# EAGLE board PentaFnord_LedBoard_0_9 (EAGLE 5.11)
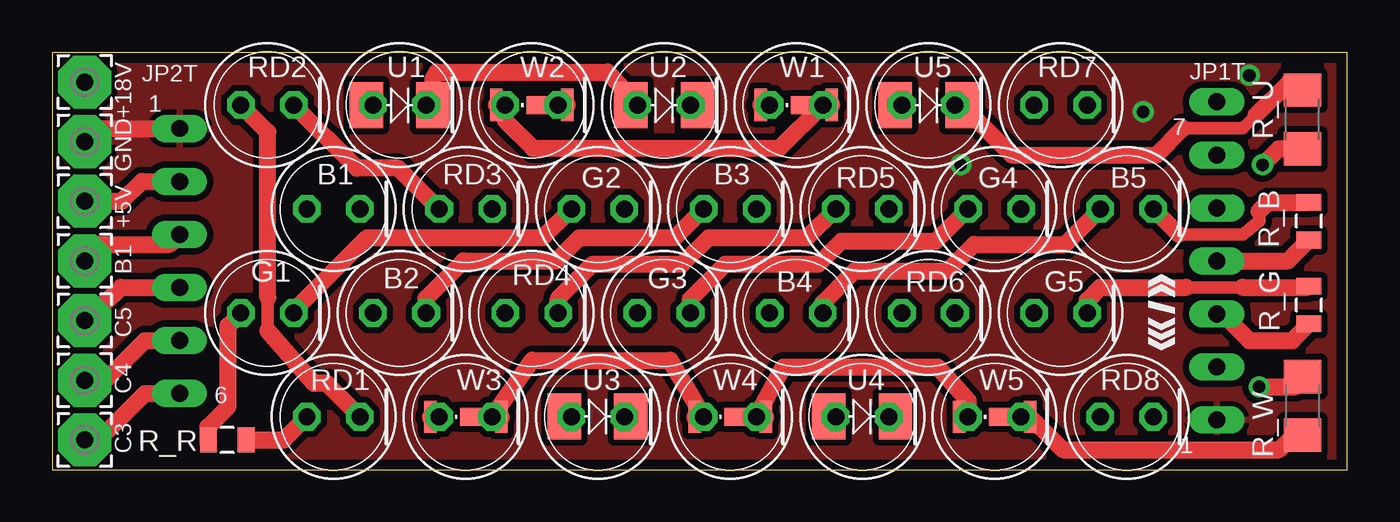
[diagram p0: board, top side]
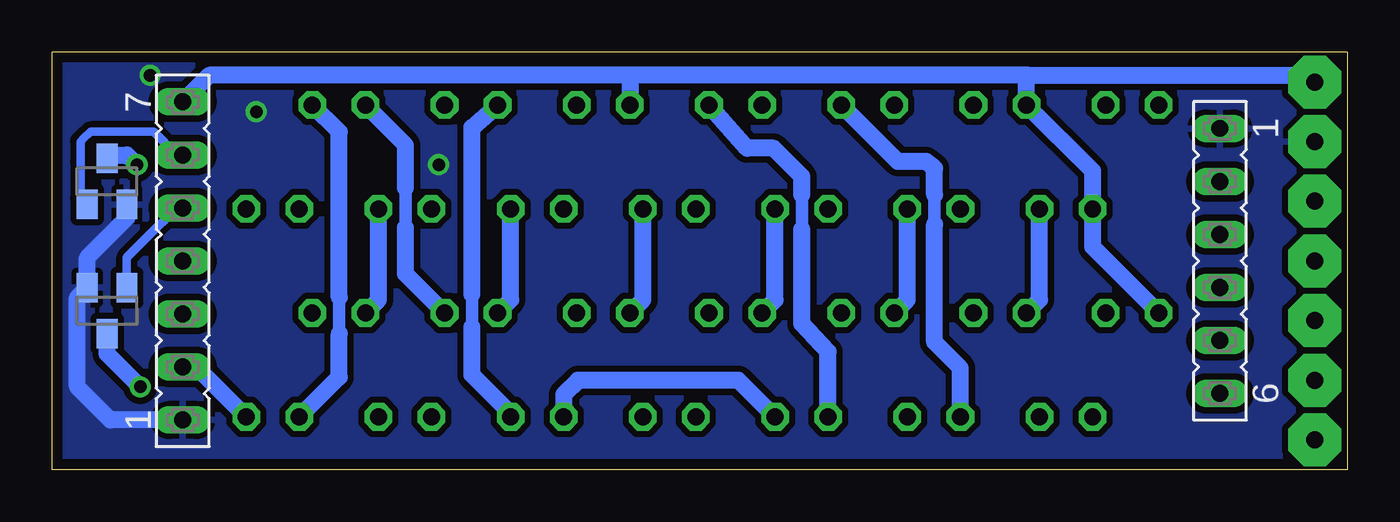
[diagram p1: board, bottom side, seen from below]

Size 62 x 20 mm. Coordinates in mm from the lower left corner, seen from the top.
Outline: 0,0 62,0 62,20 0,20 0,0
Copper layers (1*16): Top 0.035mm / dielectric 1.5mm / Bottom 0.035mm
Design rules "default *": minimum track width 12mil, minimum drill 0.4mm, track to track 10mil, track to pad 10mil, pad to pad 8mil, via to via 10mil, smd to smd 8mil, copper to edge 20mil, drill to drill 8mil, minimum pad ring 10mil, minimum via ring 8mil, stop-mask expansion 4mil, vias tented up to drill 40mil, thermal gap 10mil

## Footprints (pad centres in the part's own frame; a part is rotated, then mirrored left to right if it is on the bottom)
LED5MM = drill 0.813 octagon: A -1.27,0; K 1.27,0
FE07 = drill 0.813 long: 1 -7.62,0; 2 -5.08,0; 3 -2.54,0; 4 0,0; 5 2.54,0; 6 5.08,0; 7 7.62,0
FE06 = drill 0.813 long: 1 -6.35,0; 2 -3.81,0; 3 -1.27,0; 4 1.27,0; 5 3.81,0; 6 6.35,0
2,54/0,8 = drill 0.813 pad 2.54 octagon: 1 0,0
SOT23 = smd 1 x 1.4: 1 -0.95,-1.1; 2 0.95,-1.1; 3 0,1.1
0805 = smd 0.8 x 1.2: 1 -0.9,0; 2 0.9,0
1206 = smd 1.6 x 1.8: 1 -1.4,0; 2 1.4,0
PLCC2 = smd 1.6 x 2.2: P$1 -1.6,0; P$2 1.6,0
NICHIA_NSSL157T-H3 = smd 0.64 x 0.86: A@1 1.08,0 | smd 0.6 x 1.55: A@2 1.7,0; K@1 -1.7,0 | smd 1.66 x 0.86: K@2 -0.57,0

## Placement (x,y rotation side)
B1  [LED5MM]  13.46,12.49 0 top
B2  [LED5MM]  16.63,7.51 0 top
B3  [LED5MM]  32.45,12.49 0 top
B4  [LED5MM]  35.62,7.51 0 top
B5  [LED5MM]  51.44,12.49 0 top
G1  [LED5MM]  10.3,7.51 0 top
G2  [LED5MM]  26.12,12.49 0 top
G3  [LED5MM]  29.29,7.51 0 top
G4  [LED5MM]  45.11,12.49 0 top
G5  [LED5MM]  48.28,7.51 0 top
JP1T  [FE07]  55.75,10 90 bottom
JP2T  [FE06]  6.1,10 270 bottom
P+5T  WIREPAD2,54/0,8  [2,54/0,8]  1.56,12.86 0 top
P+18T  WIREPAD2,54/0,8  [2,54/0,8]  1.56,18.57 0 top
PB1T  WIREPAD2,54/0,8  [2,54/0,8]  1.56,10 0 top
PC3T  WIREPAD2,54/0,8  [2,54/0,8]  1.56,1.43 0 top
PC4T  WIREPAD2,54/0,8  [2,54/0,8]  1.56,4.29 0 top
PC5T  WIREPAD2,54/0,8  [2,54/0,8]  1.56,7.14 0 top
PGNDT1  WIREPAD2,54/0,8  [2,54/0,8]  1.56,15.72 0 top
Q1  BSS138  [SOT23]  59.37,13.81 0 bottom
Q2  BSS138  [SOT23]  59.37,7.62 180 bottom
R_B  tbs  [0805]  60.17,11.91 90 top
R_G  tbs  [0805]  60.17,7.89 90 top
R_R  tbs  [0805]  8.38,1.43 180 top
R_U  tbs  [1206]  59.85,16.78 90 top
R_W  tbs  [1206]  59.85,3.06 270 top
RD1  [LED5MM]  13.46,2.53 0 top
RD2  [LED5MM]  10.3,17.47 0 top
RD3  [LED5MM]  19.79,12.49 0 top
RD4  [LED5MM]  22.96,7.51 0 top
RD5  [LED5MM]  38.78,12.49 0 top
RD6  [LED5MM]  41.95,7.51 0 top
RD7  [LED5MM]  48.28,17.47 0 top
RD8  [LED5MM]  51.44,2.53 0 top
U1  NICHIA_NSSL157T-H3  [PLCC2]  16.63,17.45 180 top
U1A  [LED5MM]  16.63,17.47 0 top
U2  NICHIA_NSSL157T-H3  [PLCC2]  29.29,17.46 180 top
U2A  [LED5MM]  29.29,17.47 0 top
U3  NICHIA_NSSL157T-H3  [PLCC2]  26.11,2.55 180 top
U3A  [LED5MM]  26.12,2.53 0 top
U4  NICHIA_NSSL157T-H3  [PLCC2]  38.77,2.55 180 top
U4A  [LED5MM]  38.78,2.53 0 top
U5  NICHIA_NSSL157T-H3  [PLCC2]  41.95,17.46 180 top
U5A  [LED5MM]  41.95,17.47 0 top
W1  NICHIA_NSSL157T-H3  [NICHIA_NSSL157T-H3]  35.62,17.47 180 top
W1A  [LED5MM]  35.62,17.47 0 top
W2  NICHIA_NSSL157T-H3  [NICHIA_NSSL157T-H3]  22.96,17.47 180 top
W2A  [LED5MM]  22.96,17.47 0 top
W3  NICHIA_NSSL157T-H3  [NICHIA_NSSL157T-H3]  19.79,2.53 180 top
W3A  [LED5MM]  19.79,2.53 0 top
W4  NICHIA_NSSL157T-H3  [NICHIA_NSSL157T-H3]  32.45,2.53 180 top
W4A  [LED5MM]  32.45,2.53 0 top
W5  NICHIA_NSSL157T-H3  [NICHIA_NSSL157T-H3]  45.11,2.53 180 top
W5A  [LED5MM]  45.11,2.53 0 top

## Library data of the parts
B1-B5 G1-G5 RD1-RD8 U1A U2A U3A U4A U5A W1A W2A W3A W4A W5A = Alex_personal
JP1T JP2T = con-lsta; OC_FARNELL: unknown; OC_NEWARK: unknown
P+5T P+18T PB1T PC3T PC4T PC5T PGNDT1 = wirepad
Q1 Q2 = transistor-small-signal
R_B R_G R_R R_U R_W = SparkFun
U1-U5 W1-W5 = seb

## Nets
_VCC: JP2T.2 P+5T.1
B1: JP2T.3 PB1T.1
C3/ADC3: JP2T.6 PC3T.1
C4/ADC4/SDA: JP2T.5 PC4T.1
C5/ADC5/SCL: JP2T.4 PC5T.1
GND_T: JP1T.1 JP2T.1 PGNDT1.1 Q1.2 Q2.2
N$1: G5.K R_G.2
N$2: W4.K@1 W4A.K W5.A@2 W5A.A
N$3: U1.P$1 U1A.K U2.P$2 U2A.A
N$5: U3.P$1 U3A.K U4.P$2 U4A.A
N$6: R_U.2 U5.P$1 U5A.K
N$7: R_W.2 W5.K@1 W5A.K
N$8: W3.K@1 W3A.K W4.A@2 W4A.A
N$10: U2.P$1 U2A.K U3.P$2 U3A.A
N$11: B1.K B2.A
N$12: U4.P$1 U4A.K U5.P$2 U5A.A
N$13: G1.K G2.A
N$14: G2.K G3.A
N$15: G3.K G4.A
N$16: G4.K G5.A
N$17: B2.K B3.A
N$18: B3.K B4.A
N$19: B4.K B5.A
N$20: B5.K R_B.2
N$21: RD1.K RD2.A
N$22: RD2.K RD3.A
N$23: RD3.K RD4.A
N$24: RD4.K RD5.A
N$25: RD5.K RD6.A
N$26: RD6.K RD7.A
N$27: R_R.1 RD1.A
N$28: RD7.K RD8.A
N$29: Q1.3 R_U.1
N$34: W2.K@1 W2A.K W3.A@2 W3A.A
N$37: Q2.3 R_W.1
N$39: JP1T.6 Q1.1
N$40: JP1T.5 Q2.1
N$41: JP1T.3 R_G.1
N$42: JP1T.4 R_B.1
N$43: JP1T.2 RD8.K
N$54: W1.K@1 W1A.K W2.A@2 W2A.A
V+: B1.A G1.A JP1T.7 P+18T.1 R_R.2 U1.P$2 U1A.A W1.A@2 W1A.A

## Tracks (layer width: path | path; a pad name or v marks a point on that pad's centre or on a via)
_VCC
  Top 0.813: JP2T.2 4.29,13.81 3.33,12.86 P+5T.1
B1
  Top 0.813: PB1T.1 2.19,10.79 5.62,10.79 JP2T.3
C3/ADC3
  Top 0.813: JP2T.6 4.44,3.65 2.22,1.43 PC3T.1
C4/ADC4/SDA
  Top 0.813: JP2T.5 4.44,6.19 2.54,4.29 PC4T.1
C5/ADC5/SCL
  Top 0.813: JP2T.4 3.3,8.73 PC5T.1
GND_T  (via drill 0.6)
  Top 0.813: JP2T.1 2.03,16.35 PGNDT1.1
  Bottom 0.813: Q1.2 58.42,12.06 59.37,11.11 60.32,10.16 Q2.2 60.8,8.24 60.8,3.97 59.21,2.38 JP1T.1
  other vias: 43.5,14.61 57.31,18.89 52.23,17.14
  pour Bottom (isolate 0.305): 0,20 62,20 62,0 0,0
  pour Top (isolate 0.305): 0,20 62,20 62,0 0,0
N$1
  Top 0.61: 54.29,8.73 56.99,8.73
  Top 0.813: 54.29,8.73 50.17,8.73 49.55,8.11 G5.K | 56.99,8.73 60.11,8.73 R_G.2
N$2
  Top 0.305: W5A.A W5.A@2
  Top 0.813: W5A.A 43.84,3.31 43.3,3.91 42.39,4.92 35,4.92 W4A.K W4.K@1
N$3
  Top 0.813: U1A.K U1.P$1 18.23,18.7 18.42,19.05 26.6,19.05 U2A.A U2.P$2
N$5
  Top 0.813: U3A.K U3.P$1 | U4A.A U4.P$2
  Bottom 0.813: U4A.A 37.51,3.6 36.83,4.29 29.15,4.29 U3A.K
N$6
  Top 0.61: 54.13,16.35 56.99,16.35 57.63,16.99
  Top 0.813: 54.13,16.35 52.86,15.08 45.94,15.08 U5.P$1 U5A.K | 59.21,18.1 59.21,18.42 R_U.2 59.21,18.57 57.63,16.99
N$7
  Top 0.813: R_W.2 59.21,1.43 58.74,0.95 48.39,0.95 W5.K@1 W5A.K
N$8
  Top 0.813: W3.K@1 W3A.K 22.98,5.24 29.58,5.24 W4A.A W4.A@2
N$10
  Top 0.813: U3A.A U3.P$2 | U2A.K U2.P$1
  Bottom 0.61: 26.11,11.51 26.11,13.18
  Bottom 0.813: U3A.A 24.85,5.64 26.11,6.99 26.11,11.51 | 26.11,13.18 26.11,14.05 27.46,15.4 28.73,15.4 U2A.K
N$11
  Bottom 0.813: B1.K 14.73,8.13 B2.A
N$12
  Top 0.406: U5A.A U5.P$2
  Top 0.813: U4A.K U4.P$1
  Bottom 0.61: 41.91,6.83 41.91,8.41
  Bottom 0.813: U5A.A 41.91,16.4 41.91,8.41 | 41.91,6.83 41.91,4.55 40.05,2.69 U4A.K
N$13
  Top 0.813: G2.A 23.47,11.11 15.08,11.11 11.57,7.6 G1.K
N$14
  Bottom 0.813: G2.K 27.39,8.13 G3.A
N$15
  Top 0.813: G4.A 42.31,10.95 37.78,10.95 36.67,9.84 32.23,9.84 30.56,8.17 G3.K
N$16
  Bottom 0.813: G4.K 46.38,8.13 G5.A
N$17
  Top 0.813: B3.A 29.8,11.11 25.24,11.11 24.13,10 19.68,10 17.9,8.21 B2.K
N$18
  Bottom 0.813: B3.K 33.72,8.13 B4.A
N$19
  Top 0.813: B5.A 48.48,10.79 44.13,10.79 42.86,9.53 38.42,9.53 36.89,8 B4.K
N$20
  Top 0.61: 57.78,12.38 57.78,11.91 56.99,11.27 53.93,11.27
  Top 0.813: B5.K 53.72,11.49 53.93,11.27 | R_B.2 58.21,12.81 57.78,12.38
N$21
  Top 0.61: 10.32,6.67 10.32,8.26
  Top 0.813: RD2.A 10.32,16.18 10.32,8.26 | 10.32,6.67 12.54,4.13 13.18,4.13 13.18,4.09 RD1.K
N$22
  Top 0.813: RD2.K 14.59,14.45 16.57,14.45 RD3.A
N$23
  Bottom 0.813: RD3.K 21.06,8.13 RD4.A
N$24
  Top 0.813: RD5.A 36.13,11.11 31.43,11.11 30.16,9.84 25.88,9.84 24.23,8.19 RD4.K
N$25
  Bottom 0.813: RD5.K 40.05,8.13 RD6.A
N$26
  Bottom 0.61: 45.09,11.59 45.09,13.49
  Bottom 0.813: RD6.K 45.09,9.38 45.09,11.59 | 45.09,13.49 45.09,15.55 RD7.A
N$27
  Top 0.813: R_R.1 11.09,1.43 RD1.A
N$28
  Bottom 0.61: 48.26,6.51 48.26,8.26
  Bottom 0.813: RD7.K 48.26,16.18 48.26,8.26 | 48.26,6.51 48.26,4.44 RD8.A
N$29  (via drill 0.6)
  Top 0.813: R_U.1 58.72,15.38 v57.94,14.61
  Bottom 0.406: Q1.3 59.2,15.08
  Bottom 0.813: 59.2,15.08 58.42,15.08 v57.94,14.61
N$34
  Top 0.813: W3A.A W3.A@2 | W2A.K W2.K@1
  Bottom 0.61: 19.76,11.75 19.76,13.18
  Bottom 0.813: W3A.A 18.52,4.87 19.76,6.11 19.76,11.75 | 19.76,13.18 19.76,14.45 20.16,14.76 21.52,14.76 W2A.K
N$37  (via drill 0.6)
  Top 0.813: v57.78,3.97 59.51,3.97 R_W.1
  Bottom 0.813: Q2.3 59.37,5.56 v57.78,3.97
N$39
  Bottom 0.406: Q1.1 60.64,13.03 60.64,14.76 60.64,15.72 60.48,15.88 60.17,16.19 59.37,16.19 57.15,16.19 56.04,15.08 JP1T.6
N$40
  Top 0.813: JP1T.5 54.93,12.54
  Bottom 0.406: JP1T.5 56.04,12.54 57.47,11.11 58.42,10.16 Q2.1
N$41
  Top 0.813: JP1T.3 56.04,7.46 57.31,6.19 59.37,6.19 R_G.1
N$42
  Top 0.813: JP1T.4 59.16,10 R_B.1
N$43
  Bottom 0.813: JP1T.2 55.1,4.92 RD8.K
N$54
  Top 0.813: W1.K@1 W1A.K 34.82,15.4 23.02,15.4 21.69,16.73 W2A.A W2.A@2
V+
  Top 0.406: U1A.A U1.P$2
  Top 0.813: G1.A 8.41,6.9 8.41,3.34 8.41,3.02 7.46,2.06 7.46,1.46 R_R.2 7.46,1.3 7.46,1.91 | W1A.A W1.A@2
  Bottom 0.813: G1.A 12.19,10.68 B1.A 12.19,14.3 U1A.A 15.36,18.77 arc90 15.24,18.89 | JP1T.7 54.48,18.89 34.29,18.89 | 15.24,18.89 1.71,18.89 arc90 P+18T.1 | 15.24,18.89 34.29,18.89 | W1A.A 34.35,18.83 34.29,18.89

## Text on the board
tNames: 1 | +18V | 7 | GND | +5V | B1 | C5 | C4 | 6 | 1 | C3
bStop: PentaFnord | LedBoard 0.9